# Altium PCB audpc.PcbDoc
Units mil, origin at the board's own origin, x right, y up, seen from the top; angles counter-clockwise.
Board outline 6000 x 4000 mil, 2 copper layers (Top Layer, Bottom Layer); 23 components, 16 nets, 66 pads, 0 vias.
Unrouted connection lines stored in the file: 40.
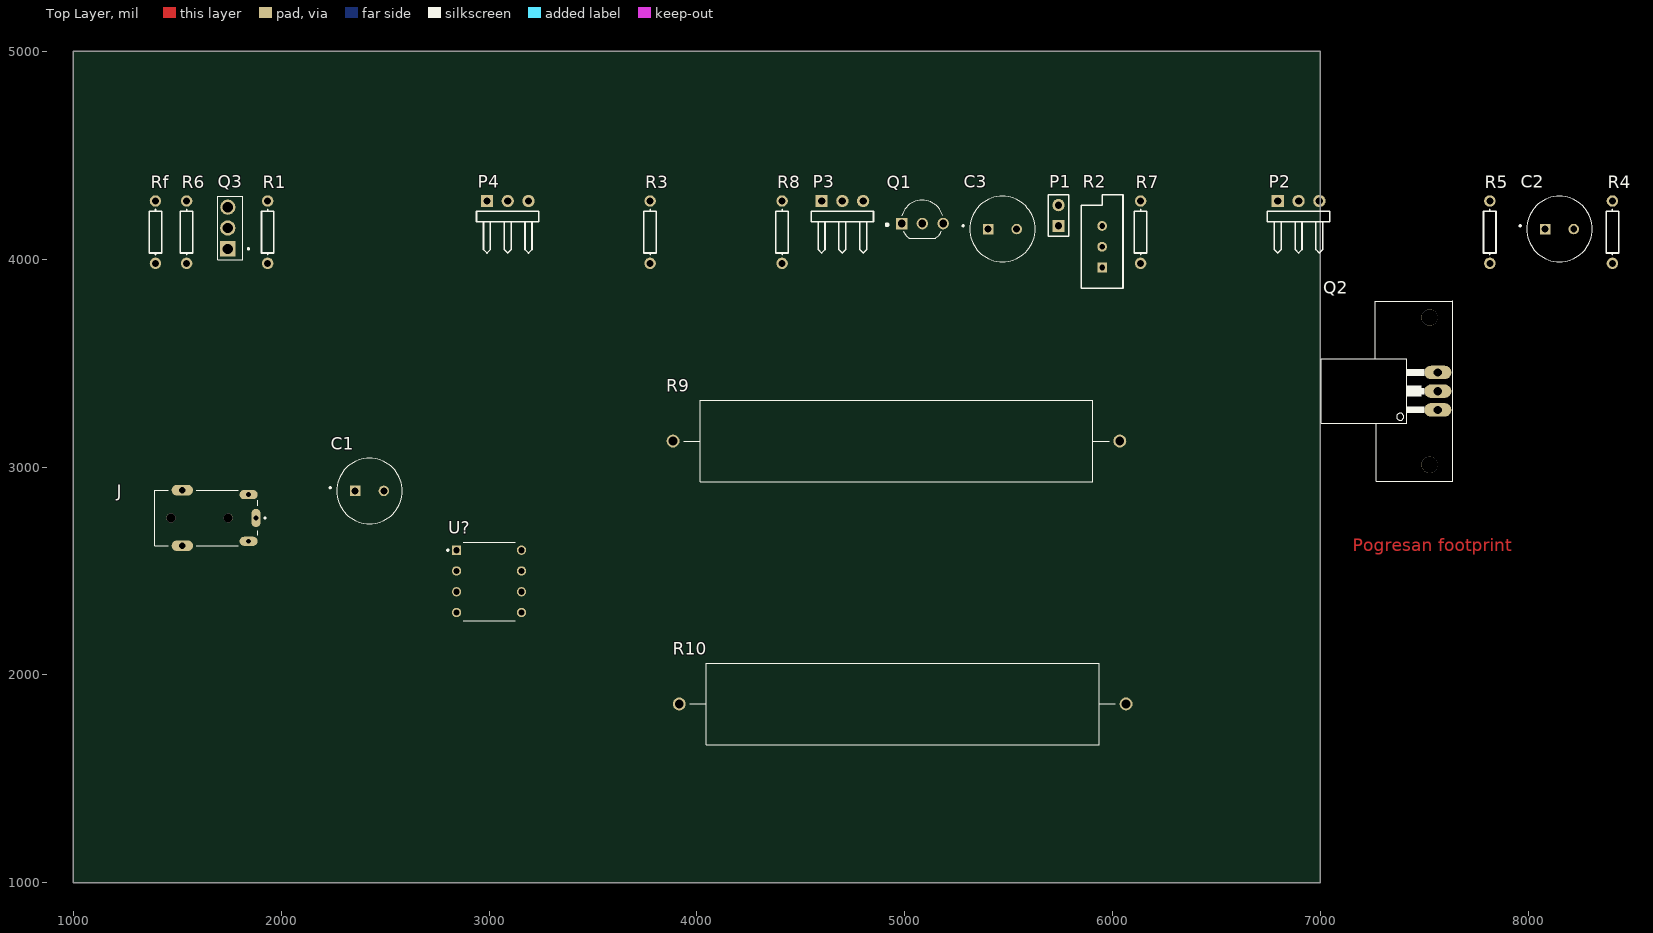
[diagram p0: Top Layer view]
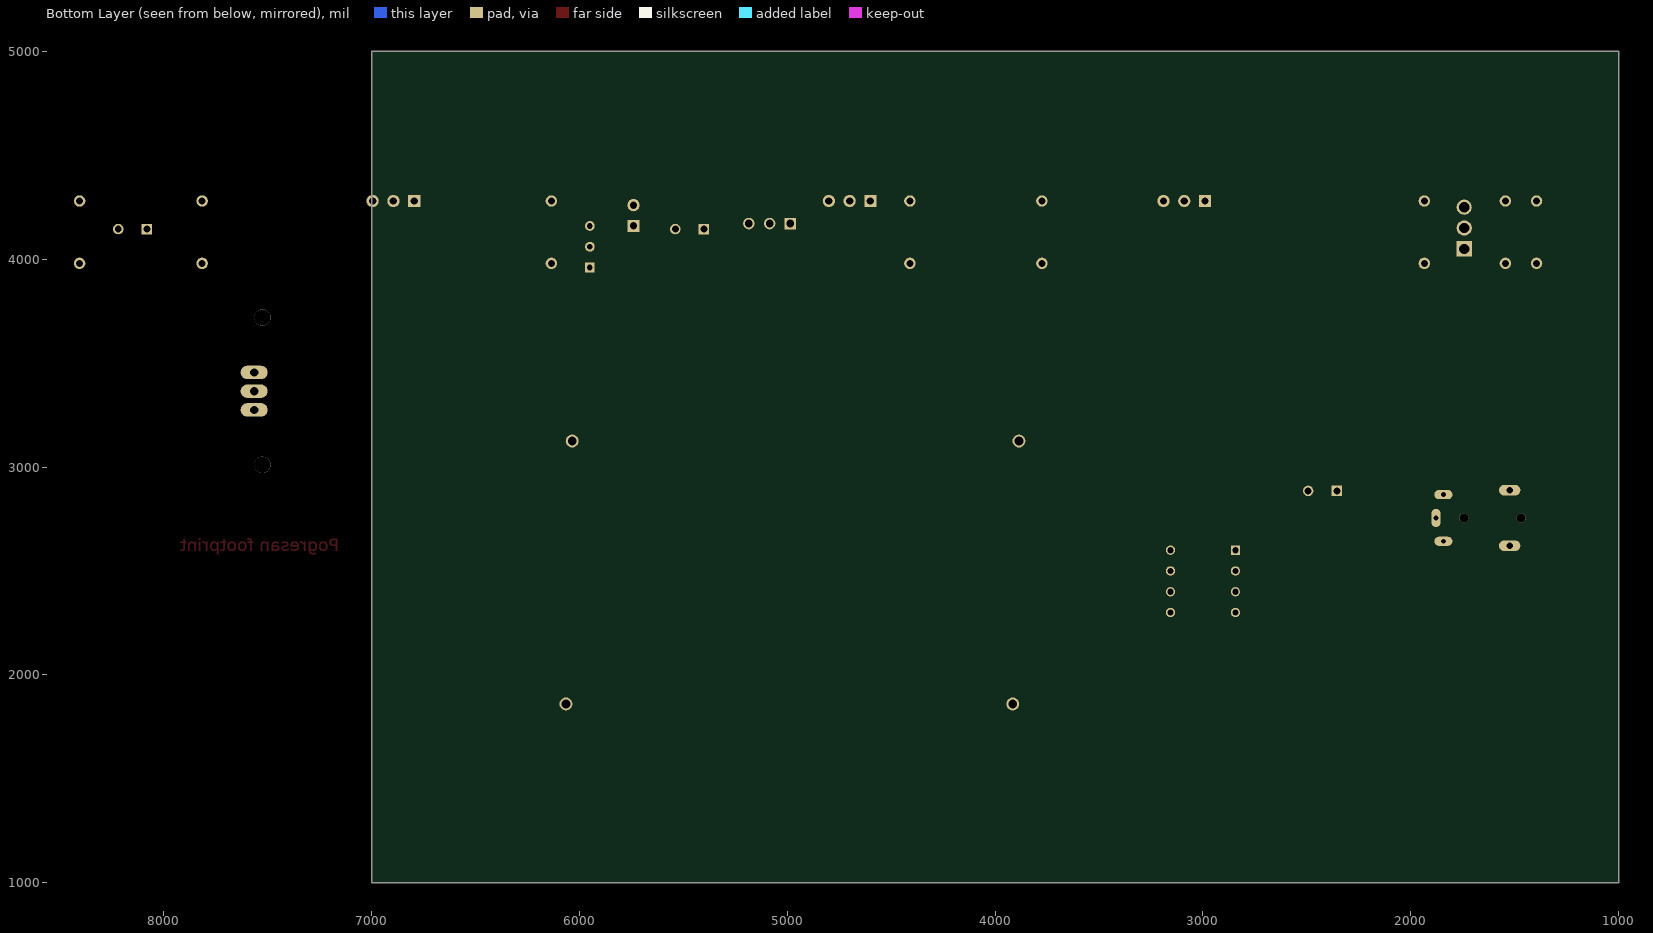
[diagram p1: Bottom Layer view, seen from below]

## Layer stack, top to bottom
Top Solder: solder mask 0.4, Solder Resist, Dk 3.5
Top Layer: signal copper 1.4
Dielectric 1: dielectric 12.6, FR-4, Dk 4.8
Bottom Layer: signal copper 1.4
Bottom Solder: solder mask 0.4, Solder Resist, Dk 3.5

## Board outline
1000,1000 7000,1000 7000,5000 1000,5000

## Design rules (kind name [scope] priority, off if disabled: settings)
Clearance [All] p1: gap=10 ignorepadtopadclearanceinfootprint=FALSE except(0: Arc-Hole Track-Hole SMDPad-Hole THPad-Hole Via-Hole Fill-Hole Poly-Hole Region-Hole Text-Hole)
PolygonConnect [All] p1: connectstyle=Relief reliefconductorwidth=10 reliefentries=4 polygonreliefangle="90 Angle" airgapwidth=10
RoutingVias [All] p1: holewidth=28 width=50 viastyle="Through Hole" minholewidth=28 minwidth=50 maxholewidth=28 maxwidth=50
SolderMaskExpansion [All] p1: expansion=4
Width [All] p1: maxlimit=10 minlimit=10 preferedwidth=10
30 further rules are at their usual default settings.

## Components (designator, comment, footprint, x,y, rotation, side; value= is the part's Value field where it differs from the comment)
C1 "ECA1HM101" CAPPRD350W60D850H1250 2425,2885 r0 top value=10uf
C2 "ECA1HM101" CAPPRD350W60D850H1250 8150,4145 r0 top value=100uf
C3 "ECA1HM101" CAPPRD350W60D850H1250 5470,4145 r0 top value=100uf
J "FC68125" CLIFF_FC68125 1745,2755 r270 top
P1 "Header 2" HDR1X2 5740,4160 r90 top
P2 "Header 3H" HDR1X3H 6795,4280 r0 top
P3 "Header 3H" HDR1X3H 4600,4280 r0 top
P4 "Header 3H" HDR1X3H 2990,4280 r0 top
Q1 "2N3904TFR" TO92254P520H877-3 5085,4205 r0 top
Q2 "BD139" TO126 7365,3365 r90 top
Q3 "BD140" TO245P780X300X1364-3 1755,4150 r90 top
R1 "Res1" AXIAL-0.3 1935,4130 r90 top value=10K
R2 "RPot" VR5 5950,4060 r90 top value=10K
R3 "Res1" AXIAL-0.3 3775,4130 r90 top value=1K
R4 "Res1" AXIAL-0.3 8405,4130 r90 top value=10K
R5 "Res1" AXIAL-0.3 7815,4130 r90 top value=10K
R6 "Res1" AXIAL-0.3 1545,4130 r90 top value=10K
R7 "Res1" AXIAL-0.3 6135,4130 r90 top value=5.1K
R8 "Res1" AXIAL-0.3 4410,4130 r90 top value=5.1K
R9 "Res1" RESAR5460W80L4950T1100H100 4960,3125 r0 top value=0.33
R10 "Res1" RESAR5460W80L4950T1100H100 4990,1860 r180 top value=0.33
Rf "Res1" AXIAL-0.3 1395,4130 r90 top value=130K
U? "TL072ACP" DIP794W45P254L959H508Q8 3000,2450 r0 top

## Footprints (in the part's own frame and the unit in brackets; to place one, negate y for a bottom-side part, rotate by r counter-clockwise, add the part's x,y. Pads: shape width x height; smd on the part's side, far side on the other; paste and mask are expansions set on the pad)
AXIAL-0.3 [mm] "Axial Device, Thru-Hole; 2 Leads; 0.3 in Pin Spacing"
  round 1.4 hole 0.85: 1(-3.81,0) 2(3.81,0)
  silkscreen extent -2.77,-0.76 2.77,0.76
CAPPRD350W60D850H1250 [mm]
  rect 1.28x1.28 hole 0.85: 1(-1.75,0)
  round 1.28 hole 0.85: 2(1.75,0)
  silkscreen extent -4.9,-4 4,4
CLIFF_FC68125 [mm]
  oval 2.216x1.108 hole 0.6: 1(0,3.4)
  oval 1.108x2.216 hole 0.6: 2(-2.85,2.5) 6(2.85,2.5)
  oval 1.308x2.616 hole 0.8: 3.1(-3.4,-5.6) 3.2(3.4,-5.6)
  round 1.1 hole 1.1 unplated: ""(0,0) ""(0,-7)
  silkscreen extent -3.4,-9 3.4,4.6
DIP794W45P254L959H508Q8 [mm]
  rect 1.13x1.13 hole 0.78: 1(-3.97,3.81)
  round 1.13 hole 0.78: 2(-3.97,1.27) 3(-3.97,-1.27) 4(-3.97,-3.81) 5(3.97,-3.81) 6(3.97,-1.27) 7(3.97,1.27) 8(3.97,3.81)
  silkscreen extent -5.13,-4.79 3.17,4.79
HDR1X2 [mm] "Connector; Header; 2 Position"
  rect 1.5x1.5 hole 0.9: 1(0,0)
  round 1.5 hole 0.9: 2(2.54,0)
  silkscreen extent -1.27,-1.27 3.81,1.27
HDR1X3H [mm] "Connector; Header; 3 Position; Right Angle"
  rect 1.5x1.5 hole 0.9: 1(0,0)
  round 1.5 hole 0.9: 2(2.54,0) 3(5.08,0)
  silkscreen extent -1.27,-6.35 6.35,-1.27
RESAR5460W80L4950T1100H100 [mm]
  round 1.58 hole 1.05: 1(-27.3,0) 2(27.3,0)
  silkscreen extent -26,-5 26,5
TO126 [mm]
  oval 1.651x3.302 hole 1: 1(-2.286,-5.08) 2(0,-5.08) 3(2.286,-5.08)
  round 2 hole 2 unplated: ""(-9,-4.08) ""(9,-4.08)
  silkscreen extent -11,-6.9 11.05,9.14, body extent -3.8,-1.52 3.8,1.14, height 13.2
TO245P780X300X1364-3 [mm]
  rect 1.85x1.85 hole 1.23: 1(-2.54,0.305)
  round 1.88 hole 1.25: 2(0,0.305)
  round 1.85 hole 1.23: 3(2.54,0.305)
  silkscreen extent -3.9,-2.32 3.9,1.56
TO92254P520H877-3 [mm]
  rect 1.41x1.41 hole 0.94: 1(-2.54,-0.853)
  round 1.41 hole 0.94: 2(0,-0.853) 3(2.54,-0.853)
  silkscreen extent -4.44,-2.62 2.47,2.01
VR5 [mm] "Thru-Hole; 3 Leads"
  rect 1.2x1.2 hole 0.7: 1(-2.54,0)
  round 1.2 hole 0.7: 2(0,0) 3(2.54,0)
  silkscreen extent -5.08,-2.54 6.35,2.54

## Part data
C1 C2 C3: "100µF 50V Aluminum Electrolytic Capacitors Radial, Can 2000 Hrs @ 85°C", Package="Radial Panasonic", Availability=Unavailable, MF=Panasonic, MP=ECA1HM101, Price=None, SnapEDA_Link=https://www.snapeda.com/parts/ECA1HM101/Panasonic/view-part/4478734/?ref=snap
J: "3.5mm 4 Pole Jack Sockets", Package="Package Analog Devices", Availability=Unavailable, MF="Cliff Electronics", MP=FC68125, Price=None, SnapEDA_Link=https://www.snapeda.com/parts/FC68125/Cliff%20Electronics/view-part/3594489/?ref=snap
P1: "Header, 2-Pin", LatestRevisionDate=17-Jul-2002, LatestRevisionNote="Re-released for DXP Platform.", Publisher="Altium Limited"
P2 P3 P4: "Header, 3-Pin, Right Angle", LatestRevisionDate=17-Jul-2002, LatestRevisionNote="Re-released for DXP Platform.", Publisher="Altium Limited"
Q1: "Bipolar _BJT_ Transistor NPN 40V 200mA 300MHz 625mW Through Hole TO-92-3", Package="TO-92 Fairchild Semiconductor", Availability=Unavailable, MF="ON Semiconductor", MP=2N3904TFR, Price=None, SnapEDA_Link=https://www.snapeda.com/parts/2N3904TFR/ON%20Semiconductor/view-part/272935/?ref=snap
Q2: "Bipolar (BJT) Transistor NPN 80V 1.5A 1.25W Through Hole TO-126-3", Package="TO-225-3 ON Semiconductor", Check_prices=https://www.snapeda.com/parts/BD139/ON%20Semiconductor/view-part/2781881/?ref=eda, Digi-Key_Part_Number=BD13916S-ND, MF="ON Semiconductor", MP=BD139, SnapEDA_Link=https://www.snapeda.com/parts/BD139/ON%20Semiconductor/view-part/2781881/?ref=snap
Q3: "Bipolar _BJT_ Transistor PNP 80V 1.5A 1.25W Through Hole SOT-32-3", Package="TO-126 STMicroelectronics", Availability=Unavailable, MF=STMicroelectronics, MP=BD140, Price=None, SnapEDA_Link=https://www.snapeda.com/parts/BD140/STMicroelectronics/view-part/4503197/?ref=snap
R1 R3 R4 R5 R6 R7 R8 R9 R10 Rf: "Resistor", LatestRevisionDate=17-Jul-2002, LatestRevisionNote="Re-released for DXP Platform.", PackageDescription="Axial Device, Thru-Hole; 2 Leads; 0.3 in Pin Spacing", PackageReference=AXIAL-0.3, Published=8-Jun-2000, Publisher="Altium Limited"
R2: "Potentiometer", LatestRevisionDate=17-Jul-2002, LatestRevisionNote="Re-released for DXP Platform.", PackageDescription="Variable Resistor, Thru-Hole; 3 Leads", PackageReference=VR5, Published=8-Jun-2000, Publisher="Altium Limited", Set Position=0.5, Sim Note="Enter the Resistance value and the set point into parameter fields."
U?: "Dual low-noise JFET-input improved offset operational amplifier 8-PDIP 0 to 70", Package="PDIP-8 Texas", Availability=Good, DigiKey-Purchase-URL=https://snapeda.com/shop?store=DigiKey&id=231831, MF="Texas Instruments", Mouser-Purchase-URL=https://snapeda.com/shop?store=Mouser&id=231831, MP=TL072ACP, Price=None, SnapEDA_Link=https://www.snapeda.com/parts/TL072ACP/Texas%20Instruments/view-part/231831/?ref=snap, Texas_Instruments-Purchase-URL=https://snapeda.com/shop?store=Texas+Instruments&id=231831

## Nets (pads, with @x,y where several pads share a name; then routed paths per layer and width w, separated by ;. In a path a pad name is that pad's centre, name@x,y a point inside that pad or via, vN(x,y) a via of type N, cw(c..) or ccw(c..) an arc to the next point about the centre after c; other vN are vias at no path point)
baza2n3055: P3.3 Q2.1 R7.1
bazamj2955: P4.3 Q3.1 R8.2
emit2n3055: P3.1 R9.1
emitmj2955: P4.1 R10.2
GND: J.6 P1.2 P2.2 U?.3
kol2n3055: P2.1 P3.2 Q2.2 R4.1
kolmj2955: P2.3 P4.2 Q3.2 R6.2
NetC1_2: C1.2 R1.2
NetC2_1: C2.1 R4.2 R5.1
NetC2_2: C2.2 P1.1 Rf.1
NetC3_1: C3.1 Q1.3 Q2.3 R2.1 R5.2
NetC3_2: C3.2 Q1.1 Q3.3 R3.1 R6.1 U?.1
NetQ1_2: Q1.2 R2.2 R2.3 R3.2
NetR1_1: R1.1 Rf.2 U?.2
NetR7_2: R7.2 R8.1 R9.2 R10.1
Vin: C1.1 J.2 J.3.1 J.3.2
pads on no net: J. J.1 Q2. U?.4 U?.5 U?.6 U?.7 U?.8

## Other copper
Top Layer:
  text "Pogresan footprint" at 7155,2595 h60

## Text inside footprints (layer, text, board x,y; h text height)
Q2: Mechanical 13 "1" at 7400,3265 h50 r90; Mechanical 13 "2" at 7400,3345 h50 r90; Mechanical 13 "3" at 7400,3435 h50 r90